# EAGLE board SecSysDem_HW (EAGLE 6.5.0)

Size 160 x 100 mm. Coordinates in mm from the lower left corner, seen from the top.
Outline: 0,0 160,0 160,100 0,100 0,0
Copper layers (1*16): Top 0.035mm / dielectric 1.5mm / Bottom 0.035mm
Design rules "default": minimum track width 10mil, minimum drill 24mil, track to track 8mil, track to pad 8mil, pad to pad 8mil, via to via 8mil, smd to smd 8mil, copper to edge 40mil, drill to drill 8mil, minimum pad ring 10mil, minimum via ring 8mil, stop-mask expansion 4mil, vias tented up to drill 0mil, thermal gap 10mil

## Footprints (pad centres in the part's own frame; a part is rotated, then mirrored left to right if it is on the bottom)
C0805 = smd 1.3 x 1.5: 1 -0.95,0; 2 0.95,0
TACTILE_SWITCH = drill 1.016 pad 1.88: 1 -3.251,2.261; 2 3.251,2.261; 3 -3.251,-2.261; 4 3.251,-2.261
XPLAINED_MINI_PINS = drill 0.8 long: P$1 0,0; P$2 -2.54,0; P$3 -5.08,0; P$4 -7.62,0; P$5 -10.16,0; P$6 -12.7,0; P$7 -17.78,0; P$8 -20.32,0; P$9 -22.86,0; P$10 -25.4,0; P$11 -27.94,0; P$12 -30.48,0; P$13 -33.02,0; P$14 -35.56,0; P$15 0,48.26; P$16 -2.54,48.26; P$17 -5.08,48.26; P$18 -7.62,48.26; P$19 -10.16,48.26; P$20 -12.7,48.26; P$21 -15.24,48.26; P$22 -17.78,48.26; P$23 -21.844,48.26; P$24 -24.384,48.26; P$25 -26.924,48.26; P$26 -29.464,48.26; P$27 -32.004,48.26; P$28 -34.544,48.26; P$29 -37.084,48.26; P$30 -39.624,48.26; P$31 -42.164,48.26; P$32 -44.704,48.26

## Placement (x,y rotation side)
C1  1uF  [C0805]  -24.13,62.23 0 top  (outside the outline)
S1  TACTILE_SWITCHTHROUGH_HOLE  [TACTILE_SWITCH]  -17.78,64.77 0 top  (outside the outline)
U1  XPLAINED_MINI_PINOUT  [XPLAINED_MINI_PINS]  -21.59,6.35 0 top  (outside the outline)

## Library data of the parts
C1 S1 U1 = Luke

## Nets
!RESET_BTN: C1.1 S1.3 S1.4 U1.P$12
+3V3: U1.P$7
GND: C1.2 S1.1 S1.2 U1.P$8 U1.P$9 U1.P$29
I2C_SCL: U1.P$1 U1.P$32
I2C_SDA: U1.P$2 U1.P$31

## Tracks (layer width: path | path; a pad name or v marks a point on that pad's centre or on a via)
!RESET_BTN  (2 unrouted)
GND  (2 unrouted)